# Altium PCB isa_svga.PcbDoc (part 2 of 2)
Units mm, origin at the board's own origin, x right, y up, seen from the top; angles counter-clockwise.
Board outline 104.14 x 87.63 mm, 2 copper layers (Front, Back); 62 components, 153 nets, 436 pads, 95 vias.
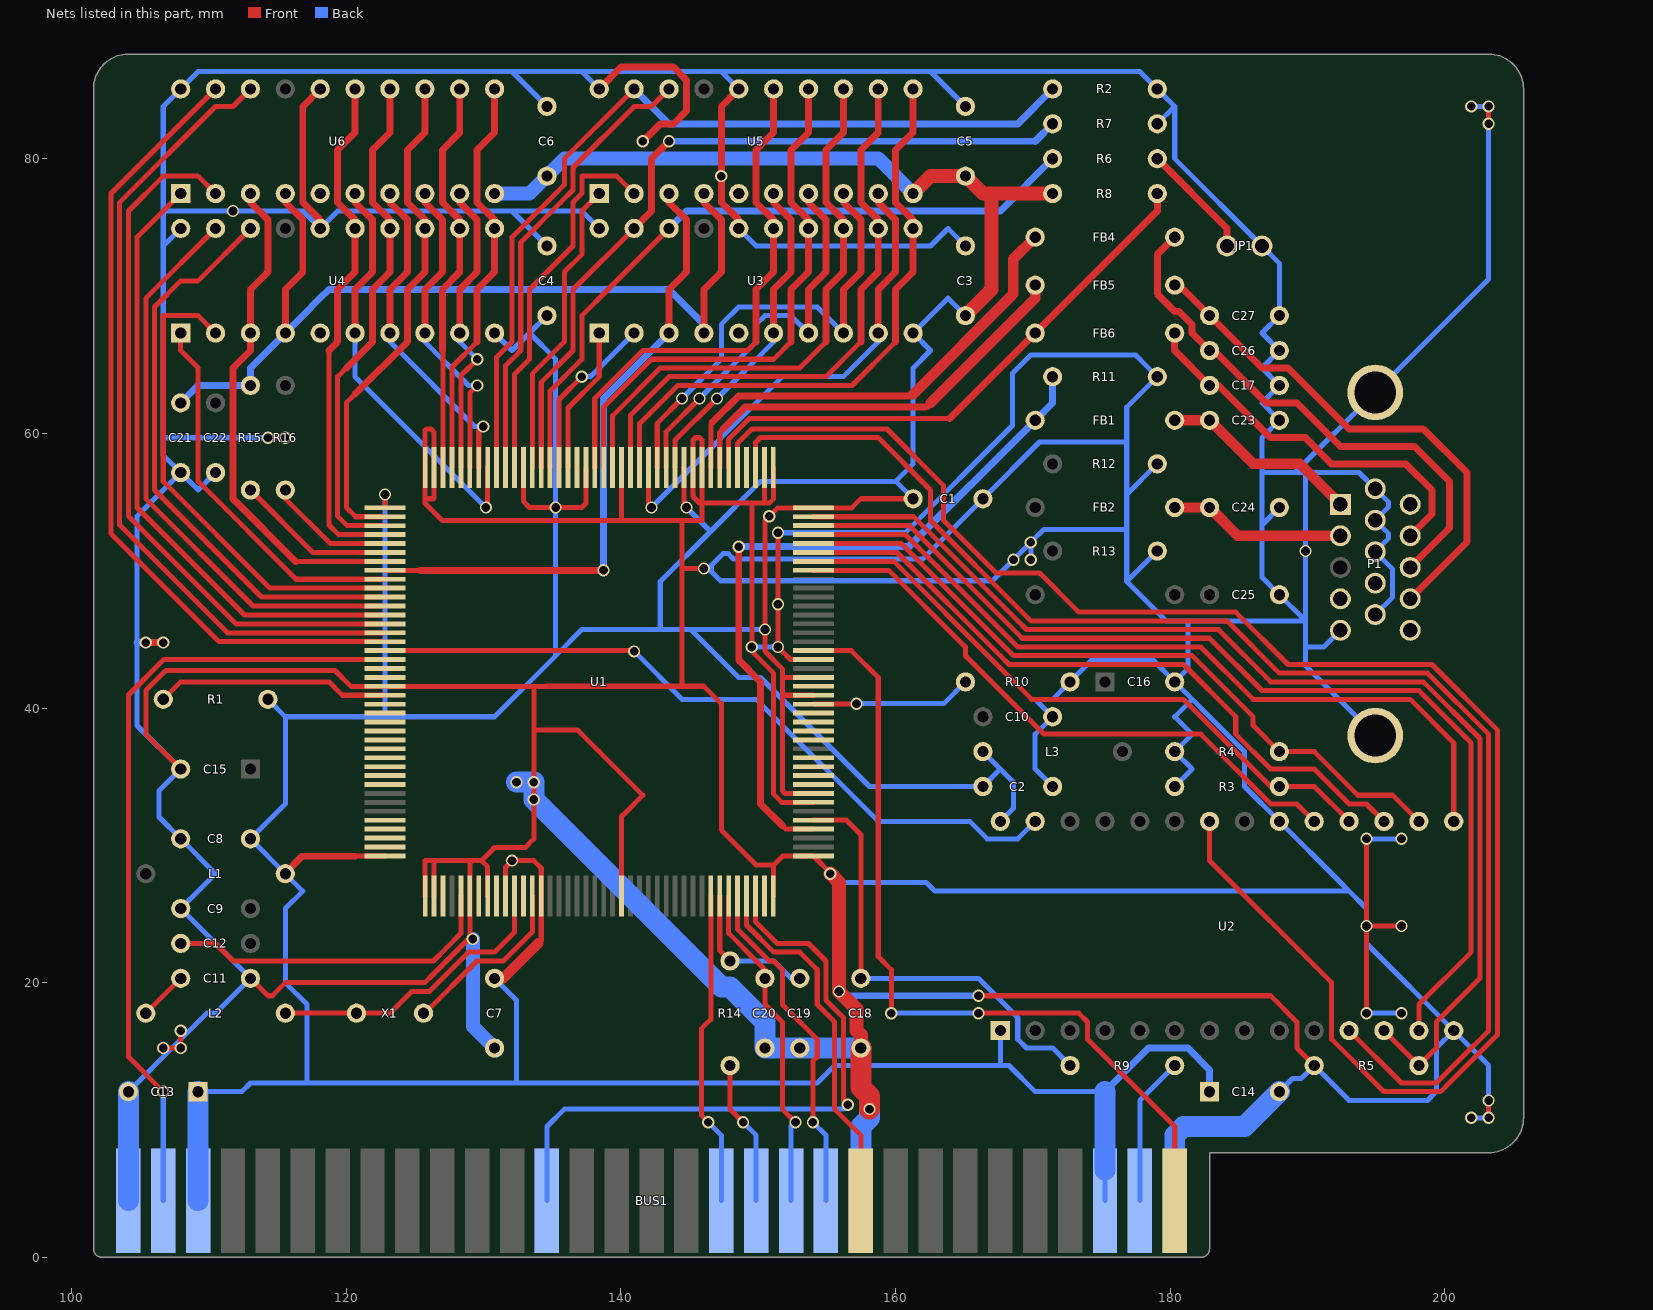
[diagram p2: the nets of this part, all layers, seen from the top]

## Via types
v1: diameter 0.889, hole 0.635, Front to Back, tented both sides, 95 vias

## Nets (pads, with @x,y where several pads share a name; then routed paths per layer and width w, separated by ;. In a path a pad name is that pad's centre, name@x,y a point inside that pad or via, vN(x,y) a via of type N, cw(c..) or ccw(c..) an arc to the next point about the centre after c; other vN are vias at no path point) (continued)
GND: BUS1.1 BUS1.10 BUS1.31 C1.2 C2.2 C3.2 C4.2 C5.2 C6.2 C7.2 C8.2 C9.2 C10.2 C11.2 C13.2 C14.2 C15.2 C16.2 C17.2 C18.2 C19.2 C20.2 C21.2 C22.2 C23.2 C24.2 C25.2 C26.2 C27.2 JP1.2 P1.5 P1.6 P1.7 P1.8 P1.10 P1.Un1 P1.Un2 R2.2 R3.2 R4.2 R5.2 R7.2 R10.2 R11.2 R12.2 R13.2 U1.1 U1.7 U1.23 U1.41 U1.42 U1.49 U1.50 U1.58 U1.79 U1.80 U1.101 U1.121 U1.122 U1.126 U1.128 U1.143 U1.160 U2.14 U2.20 U3.16 U3.20 U4.16 U4.20 U5.16 U5.20 U6.16 U6.20 | length 1092.6
  Front w0.368: v1(106.68,15.24) v1(107.95,15.24) v1(107.95,16.51) ; C15.2@107.95,35.56 105.41,38.1 105.41,41.275 106.87,42.735 119.189,42.735 120.34,41.585 U1.101@122.829,41.585 125.412,41.585 133.667,41.585 ; C11.2@113.03,20.32 114.3,19.05 114.617,19.05 115.57,20.002 125.73,20.002 126.365,20.637 128.905,23.177 v1(129.222,23.177) 129.004,23.396 U1.126@129.004,26.309 129.004,28.892 128.905,28.892 ; v1(114.3,59.69) v1(115.57,59.69) ; U1.121@125.755,26.309 125.755,28.892 125.73,28.892 126.047,28.892 126.365,28.892 ; 125.755,55.537 125.755,55.562 ; U1.122@126.406,26.309 126.406,28.892 126.365,28.892 ; U1.128@130.305,26.309 130.305,28.445 129.857,28.892 ; U1.143@140.056,26.309 140.056,31.115 140.056,31.75 140.056,32.106 140.335,32.385 141.605,33.655 138.43,36.83 137.16,38.1 136.843,38.417 133.667,38.417 ; U1.58@140.056,57.511 140.056,53.657 140.017,53.657 ; v1(146.05,50.165) 144.463,50.165 ; U1.42@150.454,57.511 150.454,54.927 150.495,54.927 ; U1.160@151.105,26.309 151.105,28.575 ; U1.41@151.105,57.511 151.105,55.22 150.812,54.927 150.495,54.927 ; v1(151.447,52.768) v1(151.447,47.561) v1(151.447,44.45) 151.765,44.133 152.362,43.536 U1.23@154.031,43.536 ; U1.7@154.031,33.137 151.722,33.137 151.13,33.729 151.13,42.545 149.86,43.815 149.542,44.133 v1(149.542,44.45) 149.542,53.657 149.542,54.927 ; v1(155.257,27.94) 155.257,28.009 U1.1@154.031,29.235 151.79,29.235 151.13,28.575 151.105,28.575 ; v1(166.052,19.05) 187.325,19.05 189.23,17.145 189.23,15.24 R5.2@190.5,13.97 ; v1(194.31,17.78) 194.31,22.86 v1(194.31,30.48) ; v1(194.31,24.13) v1(196.85,24.13) ; v1(203.2,10.16) v1(203.2,11.43) ; v1(203.2,82.55) v1(203.2,83.82) ; 125.755,55.245 125.755,54.902 127,53.657 139.065,53.657 140.017,53.657 ; 125.755,55.245 125.755,55.562 ; 125.755,55.245 126.365,55.245 126.406,55.286 126.406,55.603 U1.79@126.406,57.511 126.406,60.094 126.174,60.325 125.844,60.325 125.755,60.236 U1.80@125.755,57.511 125.755,55.562 ; 126.365,28.892 128.905,28.892 ; 128.905,28.892 129.857,28.892 ; 129.857,28.892 130.493,29.527 130.81,29.845 133.032,29.845 133.667,30.48 133.667,33.655 133.667,34.925 133.667,38.417 ; 133.667,38.417 133.667,40.005 133.667,41.585 ; 133.667,41.585 134.612,41.585 134.62,41.593 144.463,41.593 ; 140.017,53.657 144.463,53.657 ; 144.463,41.593 146.05,41.593 147.32,40.322 147.32,31.115 149.86,28.575 151.105,28.575 ; 144.463,41.593 144.463,50.165 ; 144.463,50.165 144.463,51.435 144.463,53.657 ; 144.463,53.657 145.732,53.657 145.905,53.657 145.905,55.245 ; 145.905,55.245 U1.49@145.905,57.511 145.905,59.517 145.732,59.69 145.415,59.69 145.255,59.53 U1.50@145.255,57.511 145.255,55.405 145.732,54.927 146.05,54.927 ; 145.905,55.245 145.905,54.927 146.05,54.927 ; 146.05,54.927 146.685,54.927 149.542,54.927 ; 149.542,54.927 149.86,54.927 150.495,54.927
  Front w0.505: v1(105.41,44.767) v1(106.68,44.767) ; U4.16@118.11,74.93 118.11,75.565 116.84,76.835 116.84,83.82 U6.16@118.11,85.09 ; U5.20@138.43,85.09 140.017,86.677 143.827,86.677 144.78,85.725 144.78,83.502 143.827,82.55 142.875,82.55 v1(141.605,81.28) ; U3.16@148.59,74.93 148.59,75.565 147.32,76.835 v1(147.32,78.74) 147.32,83.82 U5.16@148.59,85.09
  Front w0.762: 157.162,16.51 157.48,16.192
  Front w1.016: v1(155.257,27.94) 155.892,27.305 v1(155.892,19.367) 157.162,18.098 157.162,16.51 ; C18.2@157.48,15.24 157.48,16.192
  Front w1.524: C18.2@157.48,15.24 157.48,12.383 158.115,11.747 158.115,11.43 v1(158.115,10.795)
  Back w0.368: C13.2@104.14,12.065 107.632,15.557 ; v1(107.95,15.24) 107.632,15.557 ; U4.20@107.95,74.93 106.68,73.66 106.68,73.343 ; C22.2@110.49,57.15 109.22,55.88 C21.2@107.95,57.15 ; v1(114.3,59.69) 106.68,59.69 ; C4.2@134.62,73.66 132.08,76.2 ; C6.2@134.62,83.82 132.08,86.36 ; U3.20@138.43,74.93 137.16,76.2 132.08,76.2 ; U5.20@138.43,85.09 137.16,86.36 ; v1(146.05,50.165) 146.621,50.165 v1@146.368,50.165 ; U3.16@148.59,74.93 149.86,73.66 161.925,73.66 162.243,73.66 162.56,73.66 163.83,74.93 163.99,74.77 C3.2@165.1,73.66 ; U5.16@148.59,85.09 147.32,86.36 ; v1(149.542,44.45) v1(151.447,44.45) ; v1(151.447,52.768) 160.719,52.768 168.529,60.579 168.529,64.389 169.862,65.722 177.482,65.722 177.8,65.405 R11.2@179.07,64.135 176.847,61.912 176.847,59.372 ; v1(155.257,27.94) 155.892,27.305 156.215,27.305 ; 156.21,27.31 156.215,27.305 ; C5.2@165.1,83.82 162.56,86.36 ; v1(169.862,50.8) v1(169.862,52.07) ; C2.2@171.45,34.29 170.18,35.56 170.18,38.1 C10.2@171.45,39.37 170.498,40.322 170.18,40.64 171.45,40.64 R10.2@172.72,41.91 174.308,43.497 178.752,43.497 C16.2@180.34,41.91 ; R13.2@179.07,51.435 176.847,49.212 ; R12.2@179.07,57.785 176.847,55.562 ; R7.2@179.07,82.55 180.34,83.82 ; R3.2@180.34,34.29 181.61,35.56 R4.2@180.34,36.83 181.61,38.1 180.34,39.37 181.61,40.64 ; C14.2@187.96,12.065 188.912,13.018 189.547,13.018 R5.2@190.5,13.97 193.04,11.43 198.755,11.43 199.39,12.065 199.39,15.24 U2.14@200.66,16.51 ; C24.2@187.96,54.61 186.69,53.34 ; P1.5@192.405,45.664 191.191,44.45 189.865,44.45 ; v1(194.31,17.78) v1(196.85,17.78) ; P1.Un1@194.945,38.001 189.865,43.081 189.865,44.45 ; P1.10@194.945,46.81 196.215,48.08 196.215,50.119 P1.8@194.945,51.389 195.897,52.342 195.897,52.728 P1.7@194.945,53.68 195.897,54.633 195.897,55.019 P1.6@194.945,55.971 193.766,57.15 189.865,57.15 ; P1.Un2@195.765,61.719 P1.Un2@195.765,62.415 ; v1(196.85,30.48) v1(194.31,30.48) 194.31,25.4 ; v1(201.93,10.16) v1(203.2,10.16) ; v1(201.93,83.82) v1(203.2,83.82) ; v1(203.2,11.43) 203.2,13.97 U2.14@200.66,16.51 ; v1(203.2,82.55) 203.2,71.244 P1.Un2@194.945,62.989 189.106,57.15 ; 106.68,59.69 106.68,73.343 ; 106.68,59.69 106.68,58.42 C21.2@107.95,57.15 ; 106.68,73.343 106.68,76.2 ; 106.68,76.2 v1(111.76,76.2) 116.84,76.2 U4.16@118.11,74.93 119.38,76.2 132.08,76.2 ; 106.68,76.2 106.68,83.82 U6.20@107.95,85.09 109.22,86.36 132.08,86.36 ; 107.632,15.557 109.855,17.78 110.49,17.78 C11.2@113.03,20.32 C9.2@107.95,25.4 110.172,27.622 110.49,27.94 C8.2@107.95,30.48 106.362,32.067 106.362,33.972 C15.2@107.95,35.56 104.775,38.735 104.775,44.767 104.775,45.72 104.775,53.975 C21.2@107.95,57.15 ; 132.08,86.36 137.16,86.36 ; 137.16,86.36 147.32,86.36 ; 147.32,86.36 162.243,86.36 162.56,86.36 ; 156.215,27.305 160.655,27.305 162.243,27.305 162.877,26.67 193.04,26.67 ; 162.56,86.36 177.8,86.36 R2.2@179.07,85.09 180.34,83.82 ; v1(169.862,52.07) 170.815,53.023 176.847,53.023 ; v1(169.862,52.07) 169.545,51.752 168.91,51.117 v1(168.593,50.8) 167.069,49.276 147.256,49.276 146.621,49.911 146.621,50.419 147.447,51.244 147.828,51.244 148.209,50.863 161.988,50.863 C1.2@166.37,55.245 170.498,59.372 176.847,59.372 ; 176.847,49.212 176.847,53.023 ; 176.847,49.212 179.705,46.355 181.292,46.355 ; 176.847,53.023 176.847,55.562 ; 176.847,55.562 176.847,59.055 176.847,59.372 ; C16.2@180.34,41.91 181.292,42.862 181.292,46.355 ; C16.2@180.34,41.91 181.61,40.64 ; 180.34,83.82 180.34,80.01 JP1.2@186.69,73.66 187.96,72.39 C27.2@187.96,68.58 186.69,67.31 C26.2@187.96,66.04 186.69,64.77 C17.2@187.96,63.5 186.69,62.23 C23.2@187.96,60.96 186.69,59.69 ; 181.292,46.355 184.15,46.355 189.865,46.355 ; 181.61,40.64 182.88,39.37 185.42,36.83 185.42,34.29 U2.20@187.96,31.75 192.405,27.305 193.04,26.67 ; 186.69,53.34 186.69,59.69 ; 186.69,53.34 186.69,49.53 C25.2@187.96,48.26 189.865,46.355 ; 186.69,59.69 186.69,57.15 189.106,57.15 ; 189.106,57.15 189.865,57.15 ; 189.865,44.45 189.865,46.355 ; 189.865,46.355 v1(189.865,51.435) 189.865,57.15 ; 193.04,26.67 194.31,25.4 ; 194.31,25.4 v1(194.31,24.13) 194.31,22.86 U2.14@200.66,16.51
  Back w0.505: 104.775,44.767 v1(105.41,44.767) ; v1(155.892,19.367) 156.21,19.05 v1(166.052,19.05)
  Back w1.016: v1(129.222,23.177) 129.222,16.828 C7.2@130.81,15.24
  Back w1.524: BUS1.31@104.14,4.127 C13.2@104.14,12.065 ; v1(132.398,34.608) v1(133.667,34.608) v1(133.667,33.337) 147.32,19.685 147.955,19.685 150.495,17.145 C20.2@150.495,15.24 C19.2@153.035,15.24 C18.2@157.48,15.24 ; BUS1.10@157.48,4.127 157.48,9.525 158.115,10.16 v1(158.115,10.795) ; BUS1.1@180.34,4.127 180.34,8.89 180.975,9.525 185.42,9.525 C14.2@187.96,12.065
GREEN: C24.1 FB2.2 P1.2 | length 12.9
  Front w0.762: FB2.2@180.34,54.61 C24.1@182.88,54.61 184.945,52.545 P1.2@192.405,52.545
HSYNC: FB4.2 U1.48 | length 33.9
  Front w0.368: U1.48@146.555,57.511 146.555,60.703 146.682,60.83
  Front w0.508: 146.682,60.83 148.59,62.738 160.655,62.738 161.163,62.738 161.29,62.865
  Front w0.762: 161.29,62.865 168.435,70.01 168.593,70.168 168.593,72.707 FB4.2@170.18,74.295
I\O\R\: BUS1.14 U1.153 | length 23.1
  Front w0.368: 145.893,16.67 145.893,16.675 ; v1(146.368,9.842) 145.893,10.317 145.893,16.51 145.893,16.675 ; U1.153@146.555,26.309 146.555,17.338 145.893,16.675
  Back w0.368: v1(146.368,9.842) 147.32,8.89 BUS1.14@147.32,4.127
I\O\W\: BUS1.13 R14.1 | length 10.6
  Front w0.368: R14.1@147.955,13.97 147.955,10.795 v1(148.907,9.842)
  Back w0.368: v1(148.907,9.842) 149.86,8.89 BUS1.13@149.86,4.127
IOCHRDY: BUS1.41 U1.157 | length 26.7
  Front w0.368: U1.157@149.154,26.309 149.154,24.201 151.13,22.225 153.035,22.225 154.305,20.955 154.305,18.415 155.575,17.145 155.575,17.14 155.575,10.795 157.48,8.89 BUS1.41@157.48,4.127
M\E\M\R\: BUS1.12 C20.1 U1.155 | length 24.3
  Front w0.368: U1.155@147.856,26.309 147.856,23.594 149.86,21.59 150.495,20.955 C20.1@150.495,20.32 150.495,18.415 151.765,17.145 151.765,10.795 v1(152.718,9.842)
  Back w0.368: BUS1.12@152.4,4.127 152.4,9.525 v1(152.718,9.842)
M\E\M\W\: BUS1.11 U1.156 | length 25.3
  Front w0.368: U1.156@148.504,26.309 148.504,23.899 150.812,21.59 151.13,21.59 151.765,20.955 151.765,18.415 154.305,15.875 154.305,14.922 154.305,14.605 153.987,14.287 v1(153.987,9.842)
  Back w0.368: v1(153.987,9.842) 154.94,8.89 BUS1.11@154.94,4.127
MAA0: U1.52 U3.6 U5.6 | length 24
  Front w0.368: U1.52@143.954,57.511 143.954,59.499 v1(147.002,62.547)
  Front w0.505: U3.6@151.13,67.31 151.13,70.485 152.4,71.755 152.4,75.565 151.13,76.835 U5.6@151.13,77.47
  Back w0.368: v1(147.002,62.547) 151.13,66.675 U3.6@151.13,67.31
MAA1: U1.53 U3.7 U5.7 | length 29
  Front w0.368: U1.53@143.304,57.511 143.304,60.119 v1(145.732,62.547)
  Front w0.505: U3.7@153.67,67.31 153.67,70.485 154.94,71.755 154.94,75.565 153.67,76.835 U5.7@153.67,77.47
  Back w0.368: v1(145.732,62.547) 149.86,66.675 149.86,67.945 150.495,68.58 152.4,68.58 U3.7@153.67,67.31
MAA2: U1.54 U3.8 U5.8 | length 33.8
  Front w0.368: U1.54@142.654,57.511 142.654,60.739 v1(144.463,62.547)
  Front w0.505: U3.8@156.21,67.31 156.21,70.485 157.48,71.755 157.48,75.565 156.21,76.835 U5.8@156.21,77.47
  Back w0.368: v1(144.463,62.547) 147.32,65.405 147.32,67.945 148.59,69.215 154.305,69.215 U3.8@156.21,67.31
MAA3: U1.55 U3.9 U5.9 | length 36.4
  Front w0.368: U1.55@142.006,57.511 142.006,54.844 v1(142.24,54.61)
  Front w0.505: U3.9@158.75,67.31 158.75,70.485 160.02,71.755 160.02,75.565 158.75,76.835 U5.9@158.75,77.47
  Back w0.368: v1(142.24,54.61) 151.765,64.135 156.21,64.135 158.75,66.675 U3.9@158.75,67.31
MAA4: U1.56 U3.11 U5.11 | length 44.3
  Front w0.368: U1.56@141.356,57.511 141.356,60.711 144.145,63.5 154.305,63.5 156.845,63.5 160.02,66.675
  Front w0.505: 160.02,66.675 160.02,70.485 161.29,71.755 U3.11@161.29,74.93 161.29,75.565 160.02,76.835 160.02,80.645 161.29,81.915 U5.11@161.29,85.09
MAA5: U1.57 U3.12 U5.12 | length 42.8
  Front w0.368: U1.57@140.706,57.511 140.706,61.331 143.51,64.135 152.4,64.135 154.94,64.135 157.48,66.675
  Front w0.505: 157.48,66.675 157.48,70.485 158.75,71.755 U3.12@158.75,74.93 158.75,75.565 157.48,76.835 157.48,80.645 158.75,81.915 U5.12@158.75,85.09
MAA6: U1.59 U3.13 U5.13 | length 41.5
  Front w0.368: U1.59@139.405,57.511 139.405,61.3 142.875,64.77 150.495,64.77 153.035,64.77 154.94,66.675
  Front w0.505: 154.94,66.675 154.94,70.485 156.21,71.755 U3.13@156.21,74.93 156.21,75.565 154.94,76.835 154.94,80.645 156.21,81.915 U5.13@156.21,85.09
MAA7: U1.60 U3.14 U5.14 | length 40
  Front w0.368: U1.60@138.755,57.511 138.755,61.92 142.24,65.405 148.59,65.405 151.13,65.405 152.4,66.675
  Front w0.505: 152.4,66.675 152.4,70.485 153.67,71.755 U3.14@153.67,74.93 153.67,75.565 152.4,76.835 152.4,80.645 153.67,81.915 U5.14@153.67,85.09
MAA8: U1.61 U3.15 U5.15 | length 38.5
  Front w0.368: U1.61@138.105,57.511 138.105,62.54 141.605,66.04 149.225,66.04 149.86,66.675
  Front w0.505: 149.86,66.675 149.86,70.485 151.13,71.755 U3.15@151.13,74.93 151.13,75.565 149.86,76.835 149.86,80.645 151.13,81.915 U5.15@151.13,85.09
MAB0: U1.73 U4.6 U6.6 | length 30.8
  Front w0.368: v1(130.175,54.61) 130.305,54.74 U1.73@130.305,57.511
  Front w0.505: U4.6@120.65,67.31 120.65,70.485 121.92,71.755 121.92,75.565 120.65,76.835 U6.6@120.65,77.47
  Back w0.368: U4.6@120.65,67.31 120.65,64.135 v1(130.175,54.61)
MAB1: U1.74 U4.7 U6.7 | length 24.3
  Front w0.368: U1.74@129.654,57.511 129.654,60.185 v1(129.984,60.515)
  Front w0.505: U4.7@123.19,67.31 123.19,70.485 124.46,71.755 124.46,75.565 123.19,76.835 U6.7@123.19,77.47
  Back w0.368: U4.7@123.19,67.31 123.19,66.675 129.35,60.515 v1(129.984,60.515)
MAB2: U1.75 U4.8 U6.8 | length 23.2
  Front w0.368: U1.75@129.004,57.511 129.004,62.964 v1(129.54,63.5)
  Front w0.505: U4.8@125.73,67.31 125.73,70.485 127,71.755 127,75.565 125.73,76.835 U6.8@125.73,77.47
  Back w0.368: U4.8@125.73,67.31 125.73,66.675 128.905,63.5 v1(129.54,63.5)
MAB3: U1.76 U4.9 U6.9 | length 22
  Front w0.368: U1.76@128.354,57.511 128.354,64.219 128.905,64.77 129.222,65.087 v1(129.54,65.405)
  Front w0.505: U4.9@128.27,67.31 128.27,70.485 129.54,71.755 129.54,75.565 128.27,76.835 U6.9@128.27,77.47
  Back w0.368: U4.9@128.27,67.31 128.27,66.675 v1(129.54,65.405)
MAB4: U1.77 U4.11 U6.11 | length 29.9
  Front w0.368: U1.77@127.706,57.511 127.706,64.841 129.54,66.675
  Front w0.505: 129.54,66.675 129.54,70.485 130.81,71.755 130.81,73.025 U4.11@130.81,74.93 130.81,75.565 129.54,76.835 129.54,80.645 130.81,81.915 U6.11@130.81,85.09
MAB5: U1.78 U4.12 U6.12 | length 29.2
  Front w0.368: 127,66.04 127.056,65.984 U1.78@127.056,57.511
  Front w0.505: 127,66.04 127,70.485 128.27,71.755 U4.12@128.27,74.93 128.27,75.565 127,76.835 127,80.645 128.27,81.915 U6.12@128.27,85.09
MAB6: U1.82 U4.13 U6.13 | length 37
  Front w0.368: 120.65,62.865 120.015,62.23 120.015,60.96 120.015,54.61 120.691,53.934 U1.82@122.829,53.934
  Front w0.505: 120.65,62.865 124.46,66.675 124.46,70.485 125.73,71.755 U4.13@125.73,74.93 125.73,75.565 124.46,76.835 124.46,80.645 125.73,81.915 U6.13@125.73,85.09
MAB7: U1.83 U4.14 U6.14 | length 37.5
  Front w0.368: 120.015,64.77 119.38,64.135 119.38,62.865 119.38,53.975 120.071,53.284 U1.83@122.829,53.284
  Front w0.505: 120.015,64.77 121.92,66.675 121.92,70.485 123.19,71.755 U4.14@123.19,74.93 123.19,75.565 121.92,76.835 121.92,80.645 123.19,81.915 U6.14@123.19,85.09
MAB8: U1.84 U4.15 U6.15 | length 38
  Front w0.368: 118.745,66.04 118.745,53.34 119.451,52.634 U1.84@122.829,52.634
  Front w0.505: 118.745,66.04 119.38,66.675 119.38,70.485 120.65,71.755 U4.15@120.65,74.93 120.65,75.565 119.38,76.835 119.38,80.645 120.65,81.915 U6.15@120.65,85.09
MD0: U1.64 U3.1 | length 10.7
  Front w0.368: U1.64@136.154,57.511 136.154,59.69 136.154,59.954 136.154,61.595 136.154,61.859 138.43,64.135 138.43,65.405 U3.1@138.43,67.31
MD1: U1.65 U3.2 | length 12.4
  Front w0.368: U1.65@135.504,57.511 135.504,60.325 135.504,61.595 135.504,62.479 v1(137.16,64.135)
  Back w0.368: v1(137.16,64.135) 137.795,64.135 139.065,65.405 U3.2@140.97,67.31
MD2: R6.1 U1.66 U3.18 | length 51
  Front w0.368: U1.66@134.854,57.511 134.854,60.325 134.854,60.96 134.854,62.23 134.854,63.099 137.16,65.405 137.16,66.675 137.16,67.31 137.16,68.58 139.065,70.485 U3.18@143.51,74.93
  Back w0.505: U3.18@143.51,74.93 144.78,76.2 167.64,76.2
  Back w0.508: 167.64,76.2 R6.1@171.45,80.01
MD3: R7.1 U1.67 U3.19 | length 56.1
  Front w0.368: U1.67@134.206,57.511 134.206,61.595 134.206,62.865 134.206,63.721 136.525,66.04 136.525,67.31 136.525,70.485 U3.19@140.97,74.93
  Front w0.505: U3.19@140.97,74.93 142.24,76.2 142.24,80.01 v1(143.51,81.28)
  Back w0.505: v1(143.51,81.28) 170.18,81.28
  Back w0.508: 170.18,81.28 R7.1@171.45,82.55
MD4: U1.68 U5.1 | length 22
  Front w0.368: U1.68@133.556,57.511 133.556,63.5 133.556,64.341 135.89,66.675 135.89,67.945 135.89,71.755 137.16,73.025 137.16,74.295 137.16,75.565 137.16,76.2 U5.1@138.43,77.47
MD5: U1.70 U5.2 | length 27.6
  Front w0.368: U1.70@132.255,57.511 132.255,61.595 132.255,62.23 132.255,62.865 132.255,64.31 132.715,64.77 133.35,65.405 133.35,66.675 133.35,70.485 136.525,73.66 136.525,74.93 136.525,76.835 137.16,77.47 137.16,78.74 139.7,78.74 U5.2@140.97,77.47
MD6: U1.71 U5.18 | length 33.3
  Front w0.368: U1.71@131.605,57.511 131.605,62.865 131.605,64.135 131.605,64.93 132.08,65.405 132.085,65.405 132.715,66.035 132.715,72.39 132.715,73.66 132.715,73.914 135.636,76.835 136.525,77.724 136.525,79.375 140.97,83.82 142.24,83.82 U5.18@143.51,85.09
MD7: R2.1 U1.72 U5.19 | length 64.3
  Front w0.368: U1.72@130.955,57.511 130.955,64.77 130.955,65.55 132.08,66.675 132.08,73.025 132.08,74.295 135.255,77.47 135.89,78.105 135.89,80.01 U5.19@140.97,85.09
  Back w0.505: U5.19@140.97,85.09 143.51,82.55 168.91,82.55
  Back w0.508: 168.91,82.55 R2.1@171.45,85.09
MD16: U1.89 U4.1 | length 27.9
  Front w0.368: U4.1@107.95,67.31 107.95,66.04 109.22,64.77 109.22,56.515 116.35,49.385 U1.89@122.829,49.385
MD17: U1.90 U4.2 | length 35.8
  Front w0.368: U4.2@110.49,67.31 109.22,68.58 106.68,68.58 106.68,56.515 114.46,48.735 U1.90@122.829,48.735
MD18: U1.91 U4.18 | length 42.7
  Front w0.368: U4.18@113.03,74.93 109.22,71.12 107.95,71.12 106.045,69.215 106.045,55.88 113.84,48.085 U1.91@122.829,48.085
MD19: U1.92 U4.19 | length 42.4
  Front w0.368: U4.19@110.49,74.93 105.41,69.85 105.41,55.245 113.221,47.434 U1.92@122.829,47.434
MD20: U1.93 U6.1 | length 45.5
  Front w0.368: U6.1@107.95,77.47 104.775,74.295 104.775,54.61 112.601,46.784 U1.93@122.829,46.784
MD21: U1.94 U6.2 | length 52.1
  Front w0.368: U6.2@110.49,77.47 109.22,78.74 106.68,78.74 104.14,76.2 104.14,53.975 111.981,46.134 U1.94@122.829,46.134
MD22: U1.95 U6.18 | length 59
  Front w0.368: U6.18@113.03,85.09 111.76,83.82 110.49,83.82 103.505,76.835 103.505,53.34 111.361,45.484 U1.95@122.829,45.484
MD23: U1.96 U6.19 | length 58.8
  Front w0.368: U6.19@110.49,85.09 102.87,77.47 102.87,52.705 110.739,44.836 U1.96@122.829,44.836
MONITOR: FB6.2 R8.1 U1.46 | length 41.4
  Front w0.368: U1.46@147.856,57.511 147.856,59.591 148.59,60.325 148.907,60.642 149.352,61.087 163.957,61.087
  Front w0.508: 163.957,61.087 FB6.2@170.18,67.31 179.07,76.2 R8.1@179.07,77.47
N\M\I\: BUS1.32 U1.24 | length 60.6
  Front w0.368: U1.24@154.031,44.186 155.575,44.186 156.792,44.186 158.75,42.227 158.75,21.907 159.702,20.955 v1(159.702,17.78) ; v1(166.052,17.78) 173.355,17.78 173.99,17.145 173.99,15.875 180.34,9.525 BUS1.32@180.34,4.127
  Back w0.368: v1(159.702,17.78) v1(166.052,17.78)
Net-(C11-Pad1): C11.1 L2.1 | length 3.6
  Front w0.368: L2.1@105.41,17.78 C11.1@107.95,20.32
Net-(C12-Pad2): C12.2 U1.125 | length 24.5
  Front w0.368: C12.2@107.95,22.86 110.49,22.86 111.76,21.59 126.365,21.59 127.323,22.548 128.354,23.579 U1.125@128.354,26.309
Net-(C17-Pad1): C17.1 FB6.1 P1.12 | length 28.2
  Front w0.508: FB6.1@180.34,67.31 180.34,66.04 C17.1@182.88,63.5 183.515,63.5 187.325,59.69 189.865,59.69 191.77,57.785 197.167,57.785 199.072,55.88 199.072,54.292 199.072,54.132 P1.12@197.485,52.545
Net-(C18-Pad1): C18.1 R9.2 U1.5 | length 33.2
  Front w0.368: U1.5@154.031,31.836 156.21,31.836 156.441,31.836 157.48,30.797 C18.1@157.48,20.32
  Back w0.368: C18.1@157.48,20.32 166.052,20.32 168.91,17.462 168.91,15.875 169.545,15.24 170.815,15.24 171.45,15.24 R9.2@172.72,13.97
Net-(C19-Pad1): C19.1 R14.2 U1.154 | length 10.6
  Front w0.368: U1.154@147.206,26.309 147.206,22.339 R14.2@147.955,21.59
  Back w0.368: R14.2@147.955,21.59 151.13,21.59 152.4,20.32 C19.1@153.035,20.32
Net-(C26-Pad1): C26.1 FB4.1 P1.13 | length 39.4
  Front w0.508: FB4.1@180.34,74.295 179.07,73.025 179.07,70.168 180.34,68.897 180.657,68.897 181.61,67.945 181.61,67.31 182.245,66.675 C26.1@182.88,66.04 183.197,66.04 187.007,62.23 189.23,62.23 192.405,59.055 197.802,59.055 200.343,56.515 200.343,53.104 P1.13@197.485,50.246
Net-(C27-Pad1): C27.1 FB5.1 P1.14 | length 37.8
  Front w0.508: FB5.1@180.34,70.802 180.657,70.802 C27.1@182.88,68.58 186.69,64.77 188.595,64.77 193.04,60.325 198.438,60.325 201.612,57.15 201.612,52.083 P1.14@197.485,47.955
Net-(JP1-Pad1): JP1.1 R6.2 | length 8.5
  Front w0.508: R6.2@179.07,80.01 184.15,74.93 JP1.1@184.15,73.66
Net-(L2-Pad2): L2.2 U1.131 X1.2 | length 21.8
  Front w0.368: L2.2@115.57,17.78 X1.2@120.749,17.78 123.19,17.78 124.777,19.367 126.047,19.367 128.905,22.225 130.81,22.225 131.445,22.86 131.762,23.177 132.255,23.67 U1.131@132.255,26.309
Net-(P1-Pad4): P1.4
Net-(P1-Pad9): P1.9
Net-(P1-Pad11): P1.11
Net-(P1-Pad15): P1.15
Net-(R1-Pad1): R1.1 U1.102 | length 17.1
  Front w0.368: R1.1@106.68,40.64 107.95,41.91 118.745,41.91 119.72,40.935 U1.102@122.829,40.935
Net-(R10-Pad1): R10.1 U1.18 | length 11.8
  Front w0.368: U1.18@154.031,40.287 v1@157.127,40.287 ; v1@157.127,40.287 v1(157.162,40.322) v1@157.127,40.287
  Back w0.368: v1(157.162,40.322) 163.512,40.322 R10.1@165.1,41.91
Net-(R15-Pad1): R15.1 U1.86 | length 11.7
  Front w0.368: R15.1@113.03,55.88 117.574,51.336 118.11,51.336 U1.86@122.829,51.336
Net-(R16-Pad1): R16.1 U1.85 | length 9.2
  Front w0.368: R16.1@115.57,55.88 115.57,55.245 118.831,51.984 U1.85@122.829,51.984
Net-(U1-Pad9): U1.9
Net-(U1-Pad10): U1.10
Net-(U1-Pad11): U1.11
Net-(U1-Pad12): U1.12
Net-(U1-Pad14): U1.14
Net-(U1-Pad15): U1.15
Net-(U1-Pad16): U1.16
Net-(U1-Pad17): U1.17
Net-(U1-Pad20): U1.20
Net-(U1-Pad44): U1.44
Net-(U1-Pad63): U1.63
Net-(U1-Pad99): U1.99
Net-(U1-Pad100): U1.100
Net-(U1-Pad103): U1.103
Net-(U1-Pad104): U1.104
Net-(U1-Pad105): U1.105
Net-(U1-Pad106): U1.106
Net-(U1-Pad107): U1.107
Net-(U1-Pad108): U1.108
Net-(U1-Pad109): U1.109
Net-(U1-Pad110): U1.110
Net-(U1-Pad111): U1.111
Net-(U1-Pad112): U1.112
Net-(U1-Pad116): U1.116
Net-(U1-Pad117): U1.117
Net-(U1-Pad118): U1.118
Net-(U1-Pad119): U1.119
Net-(U1-Pad123): U1.123
Net-(U1-Pad127): U1.127
Net-(U1-Pad129): U1.129
Net-(U1-Pad132): U1.132
Net-(U1-Pad133): U1.133 X1.1 | length 13
  Front w0.368: X1.1@125.631,17.78 125.725,17.78 129.535,21.59 ; U1.133@133.556,26.309 133.556,23.701 132.08,22.225 131.762,21.907 131.445,21.59 129.535,21.59 ; 129.535,21.59 129.535,21.595 129.535,21.59
Net-(U1-Pad159): U1.159
Net-(U3-Pad5): U3.5
Net-(U4-Pad5): U4.5
Net-(U5-Pad5): U5.5
Net-(U6-Pad5): U6.5
OSC: BUS1.30 U1.98 | length 57.6
  Front w0.368: v1(106.68,12.065) 104.14,14.605 104.14,40.957 106.718,43.536 U1.98@122.829,43.536
  Back w0.368: BUS1.30@106.68,4.127 v1(106.68,12.065)
R: FB1.1 R11.1 U1.4 | length 53.1
  Front w0.368: 151.765,31.432 152.011,31.186 U1.4@154.031,31.186
  Front w0.505: v1(148.59,51.752) 148.59,43.497 150.177,41.91
  Front w0.508: 150.177,41.91 150.177,33.02 151.765,31.432
  Back w0.508: v1(148.59,51.752) 160.338,51.752 160.972,51.752 FB1.1@170.18,60.96 171.45,62.23 R11.1@171.45,64.135
R\A\S\: C21.1 R15.2 U3.4 U4.4 U5.4 U6.4 | length 66.4
  Front w0.368: U5.4@146.05,76.835 U5.4@146.05,77.47
  Front w0.505: U4.4@115.57,67.31 115.57,70.485 116.84,71.755 116.84,75.565 115.57,76.835 U6.4@115.57,77.47 ; U3.4@146.05,67.31 146.05,70.485 147.32,71.755 147.32,75.565 U5.4@146.05,76.835
  Back w0.505: C21.1@107.95,62.23 109.22,63.5 R15.2@113.03,63.5 113.03,64.77 U4.4@115.57,67.31 116.84,68.58 118.11,69.85 118.745,70.485 142.24,70.485 143.51,70.485 146.05,67.945 U3.4@146.05,67.31
R\E\F\R\E\S\H\: BUS1.19 U1.158 | length 47.3
  Front w0.368: U1.158@149.804,26.309 149.804,24.44 151.384,22.86 153.352,22.86 153.67,22.86 154.94,21.59 154.94,18.727 156.205,17.462 156.21,17.462 156.21,11.435 156.205,11.43 156.21,11.43 v1(156.528,11.112)
  Back w0.368: BUS1.19@134.62,4.127 134.62,9.525 135.89,10.795 156.21,10.795 v1(156.528,11.112)
R\O\M\C\S\: U1.45 U2.22 | length 125.3
  Front w0.368: U1.45@148.506,57.511 148.506,59.294 149.54,60.328 ; 149.542,60.33 149.54,60.328 ; U2.22@182.88,31.75 182.88,28.892 191.77,20.002 191.77,15.875 195.58,12.065 199.707,12.065 200.343,12.7 201.612,13.97 203.835,16.192 203.835,38.417 199.072,43.18 188.595,43.18 184.785,46.99 ; 184.78,46.985 184.785,46.99 ; 149.54,60.328 159.382,60.328 159.385,60.33 159.385,60.325 163.512,56.197 163.512,53.657 167.322,49.847 170.498,49.847 173.355,46.99 184.785,46.99
RED: C23.1 FB1.2 P1.1 | length 14.6
  Front w0.762: FB1.2@180.34,60.96 C23.1@182.88,60.96 186.055,57.785 189.456,57.785 P1.1@192.405,54.836
RESET: BUS1.2 R9.1 | length 10.9
  Back w0.368: BUS1.2@177.8,4.127 177.8,11.43 R9.1@180.34,13.97
RMD0: U1.43 U2.11 | length 100.5
  Front w0.368: U1.43@149.804,57.511 149.804,59.327 150.177,59.7 158.74,59.7 162.56,55.88 162.56,53.657 169.227,46.99 169.862,46.355 184.15,46.355 187.96,42.545 198.755,42.545 203.2,38.1 203.2,16.51 201.3,14.61 199.39,12.7 196.85,12.7 U2.11@193.04,16.51
RMD1: R5.1 U1.39 U2.12 | length 84.5
  Front w0.368: U1.39@154.031,53.937 161.328,53.937 168.91,46.355 169.545,45.72 183.515,45.72 187.325,41.91 198.438,41.91 202.565,37.782 202.565,20.32 199.39,17.145 199.39,15.24 R5.1@198.12,13.97 U2.12@195.58,16.51
RMD2: U1.38 U2.13 | length 81.5
  Front w0.368: U1.38@154.031,53.287 160.972,53.287 ; U2.13@198.12,16.51 198.12,18.415 201.93,22.225 201.93,37.465 ; 198.755,40.64 201.93,37.465 ; 160.972,53.287 161.026,53.287 ; 160.972,53.287 161.026,53.287 ; 161.026,53.287 169.227,45.085 182.88,45.085 186.69,41.275 198.12,41.275 201.93,37.465
RMD3: U1.37 U2.15 | length 58.6
  Front w0.368: U1.37@154.031,52.636 160.724,52.636 168.275,45.085 168.91,44.45 182.245,44.45 186.055,40.64 197.485,40.64 200.66,37.465 U2.15@200.66,31.75
RMD4: R4.1 U1.36 U2.16 | length 52.8
  Front w0.368: U1.36@154.031,51.986 160.421,51.986 167.957,44.45 168.593,43.815 181.61,43.815 186.055,39.37 186.055,38.735 R4.1@187.96,36.83 190.5,36.83 193.675,33.655 196.215,33.655 U2.16@198.12,31.75
RMD5: U1.35 U2.17 | length 50.4
  Front w0.368: U1.35@154.031,51.336 160.119,51.336 167.64,43.815 168.275,43.18 180.975,43.18 184.785,39.37 184.785,38.1 187.325,35.56 190.5,35.56 193.04,33.02 194.31,33.02 U2.17@195.58,31.75
RMD6: R3.1 U1.34 U2.18 | length 46.9
  Front w0.368: U1.34@154.031,50.686 159.88,50.686 167.386,43.18 169.926,40.64 180.975,40.64 187.325,34.29 R3.1@187.96,34.29 190.5,34.29 U2.18@193.04,31.75
RMD7: U1.33 U2.19 | length 44.4
  Front w0.368: U1.33@154.031,50.035 158.75,50.035 159.385,50.035 159.515,50.035 164.782,44.767 165.1,44.45 165.1,43.815 170.656,38.259 170.815,38.1 182.245,38.1 187.325,33.02 189.23,33.02 U2.19@190.5,31.75
ROMA0: U1.97 U2.27 | length 53.6
  Front w0.368: U1.97@122.829,44.186 139.647,44.186 139.7,44.186 140.917,44.186 v1(140.97,44.133)
  Back w0.368: v1(140.97,44.133) 144.463,40.64 149.86,40.64 150.812,39.688 158.75,31.75 165.417,31.75 166.688,30.48 168.91,30.48 U2.27@170.18,31.75
VCC: BUS1.3 BUS1.29 C1.1 C2.1 C3.1 C4.1 C5.1 C6.1 C7.1 C8.1 C13.1 C14.1 L1.1 L3.1 R1.2 R8.2 U1.8 U1.19 U1.21 U1.40 U1.51 U1.62 U1.69 U1.81 U1.120 U1.130 U1.134 U2.1 U2.28 U3.10 U4.10 U5.10 U6.10 | length 431.3
  Front w0.368: 120.65,29.21 120.675,29.235 U1.120@122.829,29.235 ; U1.81@122.829,54.585 v1(122.829,55.562) ; C7.1@130.81,20.32 C7.1@131.445,20.32 ; U1.130@131.605,26.309 131.605,28.418 v1(132.08,28.892) 132.715,28.892 133.667,28.892 134.206,28.354 U1.134@134.206,26.309 134.206,23.081 133.985,22.86 ; U1.69@132.905,57.511 132.905,55.054 133.35,54.61 v1(135.255,54.61) 137.16,54.61 137.455,54.905 U1.62@137.455,57.511 ; U1.51@144.605,57.511 144.605,54.785 v1(144.78,54.61) ; U1.8@154.031,33.785 151.963,33.785 151.765,33.983 151.765,40.957 ; U1.19@154.031,40.935 151.765,40.935 151.765,40.957 ; U1.21@154.031,42.235 151.765,42.235 151.765,42.227 ; C1.1@161.29,55.245 157.48,55.245 156.82,54.585 156.528,54.585 U1.40@154.031,54.585 151.422,54.585 v1(150.812,53.975) 150.495,53.657 v1(150.495,45.72) 150.495,44.133 151.765,42.862 151.765,42.227 ; 151.765,40.957 151.765,42.227
  Front w0.508: L1.1@115.57,27.94 115.57,27.991 116.789,29.21 120.65,29.21
  Front w0.762: C7.1@130.81,20.32 131.445,20.32 133.985,22.86
  Front w1.016: U5.10@161.29,77.47 162.56,78.74 C5.1@165.1,78.74 166.37,77.47 167.005,77.47 ; C3.1@165.1,68.58 167.005,70.485 167.005,77.47 ; R8.2@171.45,77.47 167.005,77.47
  Back w0.368: C13.1@109.22,12.065 112.395,12.065 113.03,12.7 117.157,12.7 ; R1.2@114.3,40.64 115.57,39.37 ; 117.157,16.828 117.157,17.462 ; v1(122.829,55.562) 122.829,39.413 122.872,39.37 ; C7.1@130.81,20.32 132.398,18.732 132.398,12.7 ; U4.10@130.81,67.31 132.08,66.04 133.35,67.31 ; C4.1@134.62,68.58 133.35,67.31 ; v1(144.78,54.61) 146.528,52.862 ; 146.368,53.023 146.528,52.862 ; v1(150.495,45.72) 145.097,45.72 ; C1.1@161.29,55.245 160.02,56.515 ; C3.1@165.1,68.58 163.83,69.85 U3.10@161.29,67.31 162.56,66.04 161.29,64.77 161.29,57.785 160.02,56.515 ; L3.1@166.37,36.83 167.64,35.56 ; U2.1@167.64,16.51 167.64,13.97 ; U2.28@167.64,31.75 168.593,32.703 168.593,34.608 167.64,35.56 ; BUS1.3@175.26,4.127 BUS1.3@175.26,6.35 ; 175.26,12.065 170.18,12.065 168.275,13.97 167.64,13.97 ; 115.57,39.37 122.872,39.37 ; 115.57,39.37 115.57,33.02 C8.1@113.03,30.48 L1.1@115.57,27.94 116.84,26.67 115.57,25.4 115.57,20.002 117.157,18.415 117.157,17.462 ; 117.157,12.7 117.157,17.462 ; 117.157,12.7 132.398,12.7 ; 122.872,39.37 130.81,39.37 135.255,43.815 ; 132.398,12.7 154.305,12.7 154.94,13.335 155.575,13.97 161.607,13.97 167.64,13.97 ; 133.35,67.31 135.255,65.405 v1(135.255,54.61) 135.255,43.815 ; 135.255,43.815 137.16,45.72 142.875,45.72 ; 142.875,45.72 142.875,48.578 142.875,49.212 146.525,52.862 146.528,52.862 ; 142.875,45.72 145.097,45.72 ; 145.097,45.72 148.59,42.227 150.177,42.227 158.115,34.29 C2.1@166.37,34.29 167.64,35.56 ; 146.528,52.862 150.177,56.512 150.177,56.515 150.812,56.515 159.385,56.515 160.02,56.515
  Back w0.505: 175.26,12.065 178.435,15.24 181.292,15.24 182.88,13.652 C14.1@182.88,12.065
  Back w1.016: U6.10@130.81,77.47 133.35,77.47 C6.1@134.62,78.74 135.89,80.01 158.75,80.01 U5.10@161.29,77.47
  Back w1.524: BUS1.29@109.22,4.127 C13.1@109.22,12.065 ; BUS1.3@175.26,6.35 175.26,12.065
VSYNC: FB5.2 U1.47 | length 30.5
  Front w0.368: U1.47@147.206,57.511 147.206,60.084 147.447,60.325
  Front w0.508: 147.447,60.325 149.034,61.912 149.098,61.912 162.243,61.912 162.56,62.23
  Front w0.762: 162.56,62.23 166.688,66.358 170.18,69.85 FB5.2@170.18,70.802
W\E\0\: U1.88 U3.3 U5.3 | length 46.4
  Front w0.368: U1.88@122.829,50.035 125.412,50.035 ; U5.3@143.51,76.835 U5.3@143.51,77.47
  Front w0.505: U3.3@143.51,67.31 143.51,70.485 144.78,71.755 144.78,75.565 U5.3@143.51,76.835
  Front w0.508: 125.412,50.035 v1(138.748,50.035)
  Back w0.508: v1(138.748,50.035) 138.748,62.547 U3.3@143.51,67.31
W\E\2\: U1.87 U4.3 U6.3 | length 36.8
  Front w0.368: 116.319,50.686 U1.87@122.829,50.686
  Front w0.505: 111.76,55.245 111.76,64.77 113.03,66.04 U4.3@113.03,67.31 113.03,70.485 114.3,71.755 114.3,75.565 113.03,76.835 U6.3@113.03,77.47
  Front w0.508: 111.76,55.245 116.319,50.686
copper on no net: | length 4.3
  Front w0.368: v1(165.1,58.42) v1(165.1,59.69) 166.37,58.42
  Back w0.368: v1(165.1,59.69) v1(166.37,59.69)

## Polygon pours and split planes (outlines as drawn)
GND on Front "Front-GND" (solid, remove dead copper, pour order 0): 205.74,7.62 205.74,87.63 101.6,87.63 101.6,9.207 182.88,9.207 182.88,7.62
GND on Back "Back-GND" (solid, remove dead copper, pour order 2): 205.74,7.62 205.74,87.63 101.6,87.63 101.6,9.207 107.315,9.207 107.315,13.018 114.3,20.002 114.3,25.717 113.983,26.035 112.078,26.035 111.125,26.987 111.125,41.275 118.11,48.26 118.11,70.802 119.38,72.072 166.37,72.072 167.64,70.802 167.64,66.675 163.512,62.547 163.512,55.562 160.655,53.023 147.955,53.023 145.415,50.482 145.415,48.26 146.368,47.307 168.275,47.307 169.545,46.038 169.545,16.192 183.515,16.192 184.468,15.24 184.468,10.795 184.15,10.477 180.022,10.477 179.705,10.16 179.705,9.207 182.88,9.207 182.88,7.62
VCC on Back "Back-VCC" (solid, remove dead copper, pour order 1): 179.07,9.207 179.07,10.477 179.705,11.112 183.832,11.112 183.832,14.922 183.197,15.557 168.91,15.557 168.91,45.72 167.957,46.672 146.05,46.672 144.78,47.942 144.78,50.8 147.637,53.657 160.655,53.657 162.877,55.88 162.877,62.865 167.005,66.992 167.005,70.485 166.052,71.438 119.697,71.438 118.745,70.485 118.745,47.942 111.76,40.957 111.76,27.305 112.395,26.67 114.3,26.67 114.935,26.035 114.935,19.685 107.95,12.7 107.95,9.207

## Keep-outs
Edge.Cuts:
  lines w0.381: 101.6,0.635 ccw(c102.235,0.635) 102.235,0 ; 101.6,0.635 ccw(c102.235,0.635) 102.235,0 ; 101.6,0.635 101.6,85.09 ; 101.6,0.635 101.6,85.09 ; 101.6,85.09 cw(c104.14,85.09) 104.14,87.63 ; 101.6,85.09 cw(c104.14,85.09) 104.14,87.63 ; 102.235,0 182.245,0 ; 102.235,0 182.245,0 ; 104.14,87.63 203.2,87.63 ; 104.14,87.63 203.2,87.63 ; 182.245,0 ccw(c182.245,0.635) 182.88,0.635 ; 182.245,0 ccw(c182.245,0.635) 182.88,0.635 ; 182.88,0.635 182.88,7.62 ; 182.88,0.635 182.88,7.62 ; 182.88,7.62 203.2,7.62 ; 182.88,7.62 203.2,7.62 ; 203.2,7.62 ccw(c203.2,10.16) 205.74,10.16 ; 203.2,7.62 ccw(c203.2,10.16) 205.74,10.16 ; 203.2,87.63 cw(c203.2,85.09) 205.74,85.09 ; 203.2,87.63 cw(c203.2,85.09) 205.74,85.09 ; 205.74,10.16 205.74,85.09 ; 205.74,10.16 205.74,85.09

## Silkscreen, mask and mechanical layers (free items; w line width, h text height)
F.SilkS:
  lines w0.254: 138.748,15.24 140.017,13.97 ; 140.653,14.605 141.922,13.335 ; 138.748,14.605 140.017,13.335 ; 138.748,14.605 137.477,13.335 136.207,13.335 138.748,15.875 ; 138.748,14.605 138.748,15.875 ; 138.748,15.875 140.017,14.605 ; 140.017,13.335 140.653,13.97 ; 140.017,13.335 140.017,14.605 ; 140.017,14.605 140.653,15.24 ; 140.653,13.97 141.287,13.335 142.558,13.335 140.653,15.24 ; 140.653,13.97 140.653,15.24
  text "ISA Super VGA / Version 1.1 / Copyright (C) 2017 / Sergey Kiselev" at 182.65,75.394 h1.52
  text "JP1: Select monitor's / horizontal frequency: / Open: >= 48.7 kHz / Closed: < 48.7 kHz" at 103.822,44.836 h1.02
  text "www.malinov.com" at 131.93,11.197 h1.27

## Text inside footprints (layer, text, board x,y; h text height)
C13: F.SilkS "+" at 108.581,8.886 h1.02
C14: F.SilkS "+" at 182.241,13.966 h1.02
C15: F.SilkS "+" at 112.391,32.381 h1.02
C16: F.SilkS "+" at 174.621,43.811 h1.02
U1: F.SilkS "1" at 154.742,27.936 h1.02 r90; F.SilkS "160" at 149.79,21.514 h1.02; F.SilkS "40" at 158.966,53.591 h1.02 r90; F.SilkS "10" at 158.966,34.171 h1.02 r90; F.SilkS "20" at 158.966,40.591 h1.02 r90; F.SilkS "30" at 158.966,47.091 h1.02 r90; F.SilkS "41" at 153.116,56.734 h1.02 r90; F.SilkS "81" at 123.54,55.434 h1.02 r90; F.SilkS "121" at 125.491,25.16 h1.02 r90; F.SilkS "50" at 145.966,61.066 h1.02 r90; F.SilkS "60" at 139.466,61.092 h1.02 r90; F.SilkS "70" at 132.966,61.066 h1.02 r90; F.SilkS "80" at 126.466,61.066 h1.02 r90; F.SilkS "90" at 119.642,47.741 h1.02 r90; F.SilkS "100" at 119.642,40.869 h1.02 r90; F.SilkS "110" at 119.642,34.449 h1.02 r90; F.SilkS "120" at 119.642,27.869 h1.02 r90; F.SilkS "130" at 130.396,21.514 h1.02; F.SilkS "140" at 138.816,20.069 h1.02 r90; F.SilkS "150" at 145.316,20.069 h1.02 r90